# Altium PCB PCB1.PcbDoc (part 1 of 2)
Units mil, origin at the board's own origin, x right, y up, seen from the top; angles counter-clockwise.
Board outline 3500 x 2300 mil, 2 copper layers (Top Layer, Bottom Layer); 42 components, 76 nets, 256 pads, 63 vias.
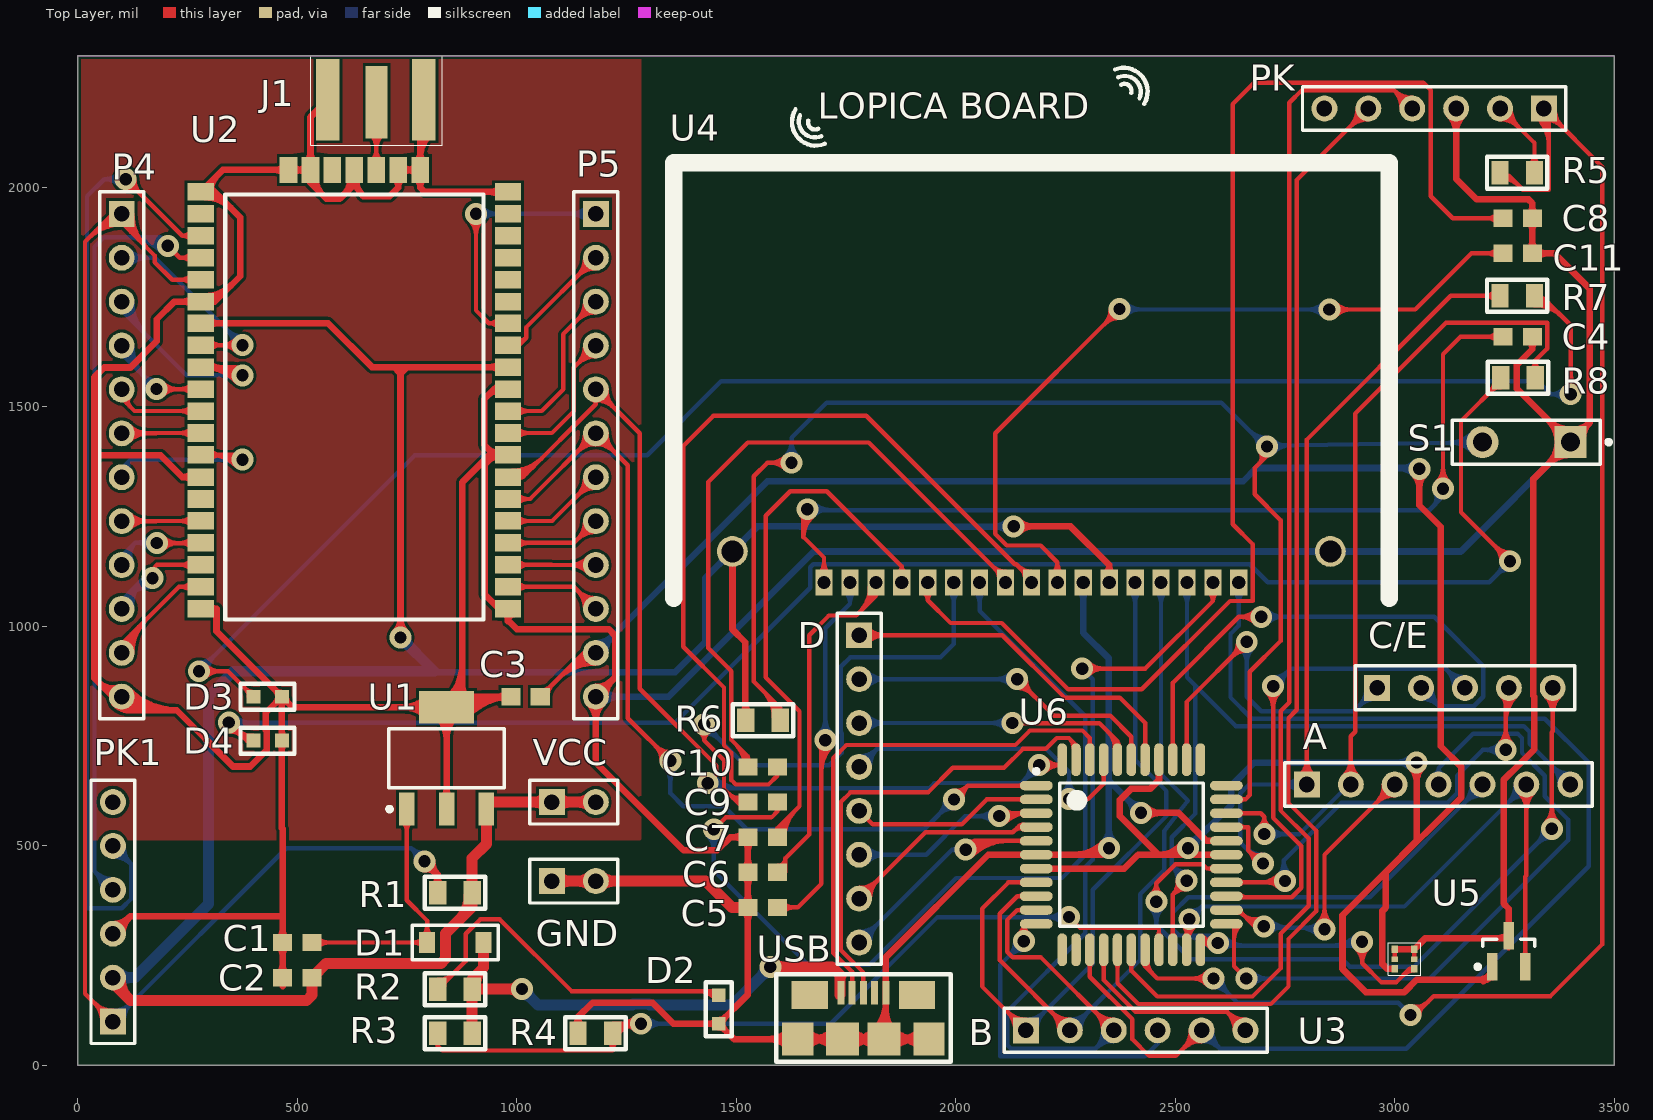
[diagram p0: Top Layer view]
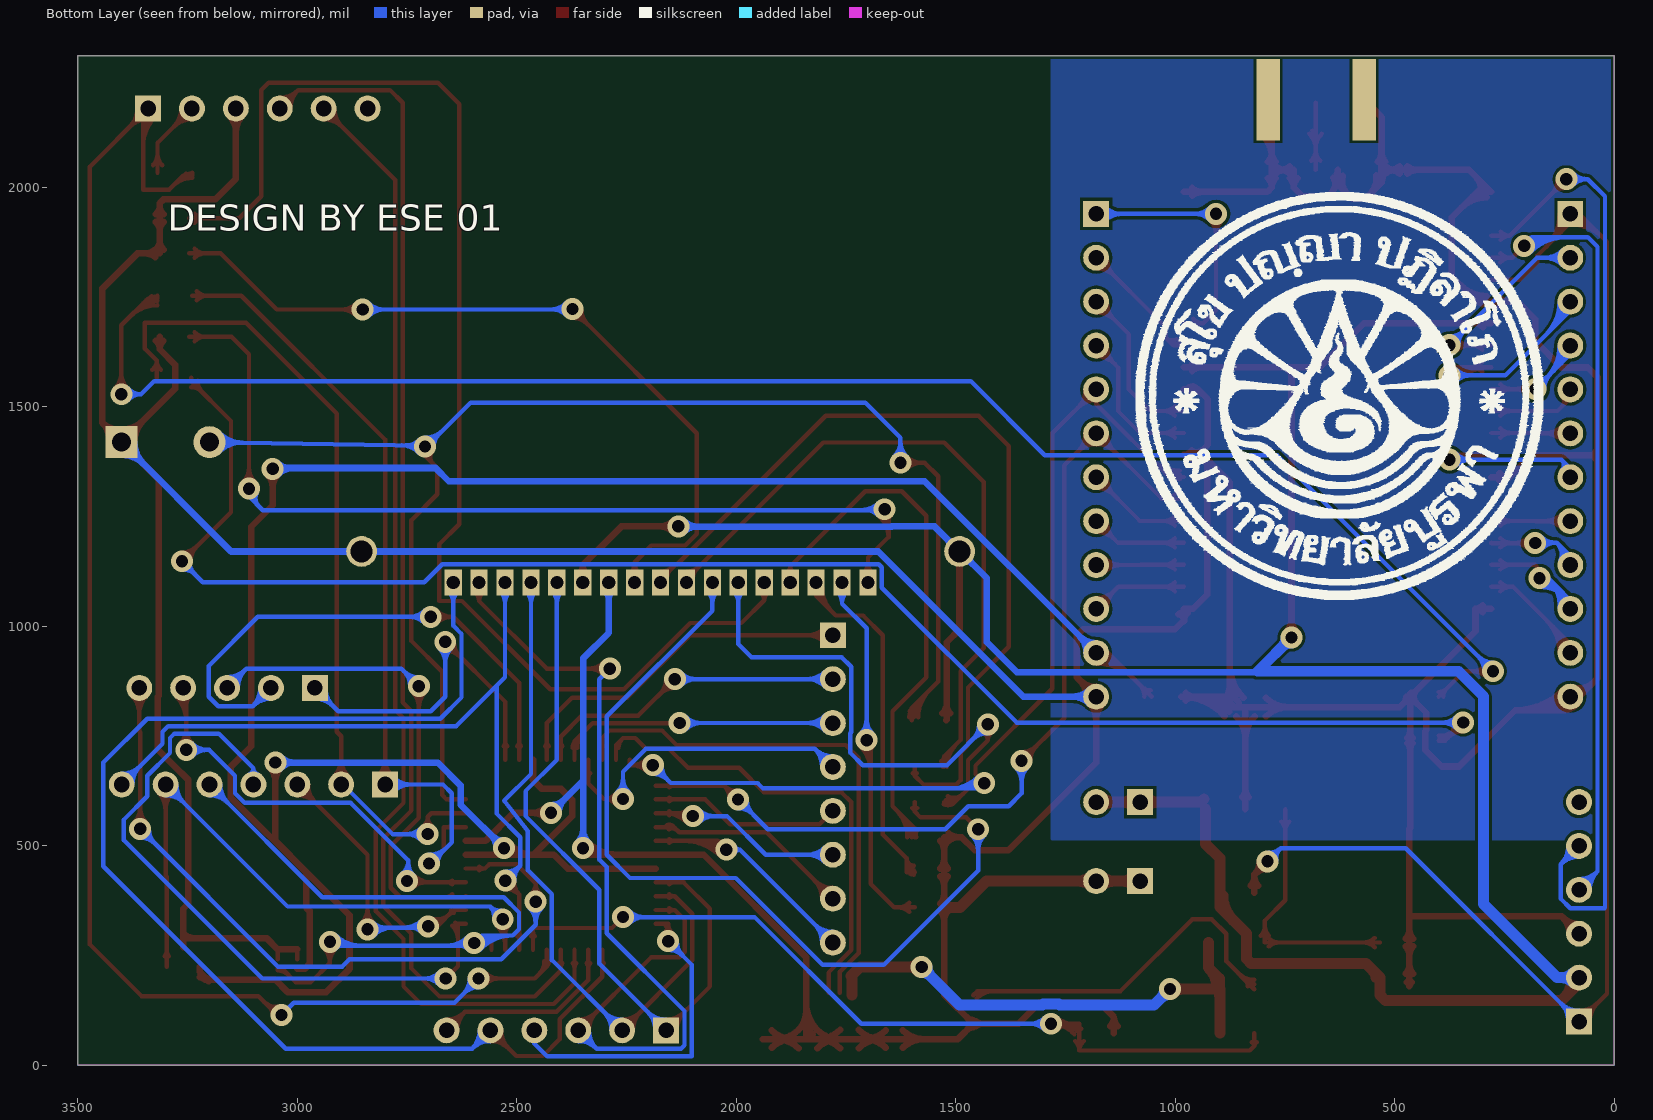
[diagram p1: Bottom Layer view, seen from below]

## Layer stack, top to bottom
Top Layer: signal copper 1.4
Dielectric: dielectric 12.6, FR-4, Dk 4.8
Bottom Layer: signal copper 1.4

## Board outline
0,0 0,2300 3500,2300 3500,0

## Design rules (kind name [scope] priority, off if disabled: settings)
Clearance [All] p1: gap=7
HoleSize [All] p1: absolutevalues=TRUE maxlimit=100 minlimit=0 maxpercent=80.000 minpercent=20.000
HoleToHoleClearance [All] p1: gap=5 allowstackedmicrovias=TRUE
MinimumSolderMaskSliver [All] p1: minsoldermaskwidth=1
PolygonConnect [All] p1: connectstyle=Relief reliefconductorwidth=10 reliefentries=4 polygonreliefangle="90 Angle"
RoutingVias [All] p1: holewidth=28 width=50 viastyle="Through Hole" minholewidth=28 minwidth=50 maxholewidth=28 maxwidth=50
SilkscreenOverComponentPads [All] p1: minsilkscreentomaskgap=1
SolderMaskExpansion [All] p1: expansion=4
TestPointUsage [All] p1: valid=0 allowmultiple=FALSE
Testpoint [All] p1: side=15 testpointundercomponent=TRUE minsize=40 maxsize=100 preferedsize=60 minholesize=0 maxholesize=40 preferedholesize=32 testpointgrid=1 style=1023 order=0-112345678
Width [All] p1: maxlimit=100 minlimit=10 preferedwidth=15
20 further rules are at their usual default settings.

## Components (designator, comment, footprint, x,y, rotation, side; value= is the part's Value field where it differs from the comment)
A "PINA" HDR1X7 2800,640 r0 top (schematic designator P2)
B "PINB" HDR1X6 2160,80 r0 top (schematic designator P3)
C1 "10V" 1608[0603] 500,280 r0 top
C2 "10V" 1608[0603] 500,200 r0 top
C3 "10V" 1608[0603] 1020,840 r0 top
C4 "10V" 1608[0603] 3280,1660 r180 top
C5 "10V" 1608[0603] 1560,360 r0 top
C6 "10V" 1608[0603] 1560,440 r0 top
C7 "10V" 1608[0603] 1560,520 r0 top
C8 "10V" 1608[0603] 3280,1930 r180 top
C9 "10V" 1608[0603] 1560,600 r0 top
C10 "10V" 1608[0603] 1560,680 r180 top
C11 "10V" 1608[0603] 3280,1850 r180 top
C/E "PINC/E" HDR1X5 2960,860 r0 top (schematic designator P7)
D "PIND" HDR1X8 1780,980 r270 top (schematic designator P6)
D1 "MBR0520LT1G" Diode 860,280 r0 top
D2 "RED" LED 1460,160 r270 top
D3 "RED" LED 400,840 r0 top
D4 "Green" LED 400,740 r0 top
GND "GND" HDR1X2 1080,420 r0 top (schematic designator P11)
J1 "Antenna" Antenna 569.5,2200 r0 top
P4 "Header 12" HDR1X12 100,1940 r270 top
P5 "Header 12" HDR1X12 1180,1940 r270 top
PK "DNP pickit" HDR1X6 3340,2180 r180 top (schematic designator P9)
PK1 "DNP Pickit3" HDR1X6 80,100 r90 top (schematic designator P1)
R1 "Res3" Resistor 800,420 r0 top
R2 "Res3" Resistor 800,200 r0 top
R3 "Res3" Resistor 800,100 r0 top
R4 "Res3" Resistor 1120,100 r0 top
R5 "Res3" Resistor 3220,2060 r0 top
R6 "Res3" Resistor 1620,760 r180 top
R7 "Res3" Resistor 3220,1780 r0 top
R8 "Res3" Resistor 3340,1540 r180 top
S1 "SW-PB" SPST-2 3300,1420 r180 top
U1 "MCP1825S-3302E/DB" SOT-223-DB3_L 840,700 r90 top
U2 "RN2903" RN2903 280,2040 r0 top
U3 "PNJ4K01FTR-ND" PNJ4K01FTR-ND 3000,220 r0 top
U4 "OLED" OLED 1700,1100 r0 top
U5 "MCP9700" SOT95P237X10-3N 3260,260 r90 top
U6 "Pic18lf45k50" TQFP80P1200X1200X120-44N 2400,480 r0 top
USB "USB MICRO" "CONN USB MICRO B" 1640,60 r0 top (schematic designator P8)
VCC "VCC" HDR1X2 1080,600 r0 top (schematic designator P10)

## Footprints (in the part's own frame and the unit in brackets; to place one, negate y for a bottom-side part, rotate by r counter-clockwise, add the part's x,y. Pads: shape width x height; smd on the part's side, far side on the other; paste and mask are expansions set on the pad)
1608[0603] [mm] "Chip Capacitor; Body 1.6 x 0.8 mm (LxW typ)"
  rect 1.1x1 smd: 1(-0.85,0) 2(0.85,0)
Antenna [mm] "SMA-J-P-X-ST-EM1"
  rect 1.27x4.2 smd: 1(2.825,-0.15)
  rect 1.35x4.7 smd: 2(0,0) 3(5.56,0)
  rect 1.35x4.7 smd far side: 4(0,0) 5(5.56,0)
  silkscreen extent -1,-2.63 6.63,2.5
"CONN USB MICRO B" [mm] "10118192-0001LF"
  rect 2.1x1.6 smd: 0(0.7,2.55) 0(6.9,2.55)
  round 0.25 on Top Overlay: 0(2.05,3.325)
  rect 0.4x1.35 smd: 1(2.5,2.675) 2(3.15,2.675) 3(3.8,2.675) 4(4.45,2.675) 5(5.1,2.675)
  rect 1.8x1.9 smd: 6(0,0) 9(7.6,0)
  rect 1.9x1.9 smd: 7(2.6,0) 8(5,0)
  silkscreen extent -1.25,-1.3 8.85,3.75
Diode [mm]
  rect 0.91x1.22 smd: 1(-1.635,0) 2(1.635,0)
  silkscreen extent -2.48,-1 2.48,1
HDR1X2 [mm] "Connector; Header; 2 Position"
  rect 1.5x1.5 hole 0.9: 1(0,0)
  round 1.5 hole 0.9: 2(2.54,0)
  silkscreen extent -1.27,-1.27 3.81,1.27
HDR1X5 [mm] "Connector; Header; 5 Position"
  rect 1.5x1.5 hole 0.9: 1(0,0)
  round 1.5 hole 0.9: 2(2.54,0) 3(5.08,0) 4(7.62,0) 5(10.16,0)
  silkscreen extent -1.27,-1.27 11.43,1.27
HDR1X6 [mm] "Connector; Header; 6 Position"
  rect 1.5x1.5 hole 0.9: 1(0,0)
  round 1.5 hole 0.9: 2(2.54,0) 3(5.08,0) 4(7.62,0) 5(10.16,0) 6(12.7,0)
  silkscreen extent -1.27,-1.27 13.97,1.27
HDR1X7 [mm] "Connector; Header; 7 Position"
  rect 1.5x1.5 hole 0.9: 1(0,0)
  round 1.5 hole 0.9: 2(2.54,0) 3(5.08,0) 4(7.62,0) 5(10.16,0) 6(12.7,0) 7(15.24,0)
  silkscreen extent -1.27,-1.27 16.51,1.27
HDR1X8 [mm] "Connector; Header; 8 Position"
  rect 1.5x1.5 hole 0.9: 1(0,0)
  round 1.5 hole 0.9: 2(2.54,0) 3(5.08,0) 4(7.62,0) 5(10.16,0) 6(12.7,0) 7(15.24,0) 8(17.78,0)
  silkscreen extent -1.27,-1.27 19.05,1.27
HDR1X12 [mm] "Connector; Header; 12 Position"
  rect 1.5x1.5 hole 0.9: 1(0,0)
  round 1.5 hole 0.9: 2(2.54,0) 3(5.08,0) 4(7.62,0) 5(10.16,0) 6(12.7,0) 7(15.24,0) 8(17.78,0) 9(20.32,0) 10(22.86,0) 11(25.4,0) 12(27.94,0)
  silkscreen extent -1.27,-1.27 29.21,1.27
LED [mm] "APT1608EC"
  rect 0.8x0.8 smd: 1(0,0) 2(1.65,0)
  silkscreen extent -0.75,-0.75 2.38,0.75
OLED [mil] "NHD-C12832A1Z-FSW-FBW-3V3"
  rect 39.37x60 hole 30: 1(0,0) 2(59.06,0) 3(118.11,0) 4(177.17,0) 5(236.22,0) 6(295.28,0) 7(354.33,0) 8(413.39,0) 9(472.44,0) 10(531.5,0) 11(590.55,0) 12(649.61,0) 13(708.66,0) 14(767.72,0) 15(826.77,0) 16(885.83,0) 17(944.88,0)
  round 70 hole 50: 18(-208.66,70.87) 19(1153.54,70.87)
  silkscreen extent -343,-35 1287,957, body extent -345,-47 1294,960, height 161
PNJ4K01FTR-ND [mm] "PNJ4K01F"
  rect 0.37x0.43 smd: 1(0,0) 3(0,1.125) 4(1.13,1.125) 6(1.13,0)
  rect 0.37x0.3 smd: 2(0,0.56) 5(1.13,0.56)
  rect 0.1x0.1 on Top Overlay: 2(0.425,0.825) 2(0.7,0.825)
  silkscreen extent -0.38,-0.38 1.5,1.5, body extent -0.08,-0.23 1.2,1.35, height 0.53
Resistor [mm] "RNCF0805DTE10K0"
  rect 1x1.35 smd: 1(0.5,-0.675) 2(2.5,-0.675)
  silkscreen extent -0.25,-1.6 3.25,0.25
RN2903 [mil]
  rect 60x40 smd mask+3.94: 1(700,-999.61) 2(700,-949.61) 3(700,-899.61) 4(700,-849.61) 5(700,-799.61) 6(700,-749.61) 7(700,-699.61) 8(700,-649.21) 9(700,-599.21) 10(700,-549.21) 11(700,-499.21) 12(700,-449.21) 13(700,-399.21) 14(700,-349.21) 15(700,-300) 16(700,-250) 17(700,-200) 18(700,-150) 19(700,-100) 20(700,-50) 28(0,-50) 29(0,-100) 30(0,-150) 31(0,-200) 32(0,-250) 33(0,-300) 34(0,-349.21) 35(0,-399.21) 36(0,-449.21) 37(0,-499.21) 38(0,-549.21) 39(0,-599.21) 40(0,-649.21) 41(0,-699.61) 42(0,-749.61) 43(0,-799.61) 44(0,-849.61) 45(0,-899.61) 46(0,-949.61) 47(0,-999.61)
  rect 40x60 smd mask+3.94: 21(500,0) 22(450,0) 23(400,0) 24(350,0) 25(300,0) 26(250,0) 27(200,0)
  silkscreen extent 56,-1024 644,-56, body extent 0,-1050 700,0, height 131
SOT95P237X10-3N [mm] "SOT23, 3-Leads, Body 3.0x2.6mm (max), Pitch 0.95mm, IPC Medium Density"
  rect 1.6x0.6 smd: 1(-0.9,0.95) 2(-0.9,-0.95) 3(0.9,0)
  silkscreen extent -1.02,-1.5 0.7,1.92, body extent -0.7,-1.52 0.7,1.53, height 1.12
SOT-223-DB3_L [mm] "SOT223, 4-Leads, Body 6.5x3.5mm, Pitch 2.3mm, Lead Span 7mm, IPC High Density"
  rect 1.9x0.9 smd: 1(-2.95,2.3) 2(-2.95,0) 3(-2.95,-2.3)
  rect 1.9x3.2 smd: 4(2.95,0)
  silkscreen extent -3.07,-3.35 1.7,3.42, body extent -1.85,-3.35 1.85,3.35, height 1.8
SPST-2 [mm] "Circuit Breaker; 2 Leads"
  rect 1.85x1.85 hole 1.1: 1(-2.54,0)
  round 1.85 hole 1.1: 2(2.54,0)
  silkscreen extent -4.89,-1.27 4.28,1.27
TQFP80P1200X1200X120-44N [mm] "TQFP, 44-Leads, Body 12.0x12.0mm (max), Pitch 0.80mm, IPC Medium Density"
  oval 1.9x0.55 smd: 1(-5.5,4) 2(-5.5,3.2) 3(-5.5,2.4) 4(-5.5,1.6) 5(-5.5,0.8) 6(-5.5,0) 7(-5.5,-0.8) 8(-5.5,-1.6) 9(-5.5,-2.4) 10(-5.5,-3.2) 11(-5.5,-4) 23(5.5,-4) 24(5.5,-3.2) 25(5.5,-2.4) 26(5.5,-1.6) 27(5.5,-0.8) 28(5.5,0) 29(5.5,0.8) 30(5.5,1.6) 31(5.5,2.4) 32(5.5,3.2) 33(5.5,4)
  oval 0.55x1.9 smd: 12(-4,-5.5) 13(-3.2,-5.5) 14(-2.4,-5.5) 15(-1.6,-5.5) 16(-0.8,-5.5) 17(0,-5.5) 18(0.8,-5.5) 19(1.6,-5.5) 20(2.4,-5.5) 21(3.2,-5.5) 22(4,-5.5) 34(4,5.5) 35(3.2,5.5) 36(2.4,5.5) 37(1.6,5.5) 38(0.8,5.5) 39(0,5.5) 40(-0.8,5.5) 41(-1.6,5.5) 42(-2.4,5.5) 43(-3.2,5.5) 44(-4,5.5)
  silkscreen extent -5.62,-4.15 4.15,4.95, body extent -5,-5 5,5, height 1.2

## Part data
A: library part "Header 7", "Header, 7-Pin"
B PK PK1: library part "Header 6", "Header, 6-Pin"
C1 C2 C3 C4 C5 C6 C7 C8 C9 C10 C11: library part "Cap Semi", "Capacitor (Semiconductor SIM Model)"
C/E: library part "Header 5", "Header, 5-Pin"
D: library part "Header 8", "Header, 8-Pin"
D1: library part MBR0520LT1GOSTR-ND
D2 D3 D4: library part LED2, "Typical RED, GREEN, YELLOW, AMBER GaAs LED"
GND VCC: library part "Header 2", "Header, 2-Pin"
P4 P5: "Header, 12-Pin"
R1 R2 R3 R4 R5 R6 R7 R8: "Resistor"
S1: "Switch"
U1: "500 mA, Low Voltage, Low Quiescent Current LDO Regulator, 3-Pin SOT-223, Extended Temperature"
USB: library part "CONN USB MICRO B"

## Via types
v1: diameter 50, hole 28, Top Layer to Bottom Layer, 63 vias

## Nets (pads, with @x,y where several pads share a name; then routed paths per layer and width w, separated by ;. In a path a pad name is that pad's centre, name@x,y a point inside that pad or via, vN(x,y) a via of type N, cw(c..) or ccw(c..) an arc to the next point about the centre after c; other vN are vias at no path point)
3.3V: PK.2 R5.2 | length 382.9
  Top Layer w10: PK.2@3240,2155.47 cw(c3240,2096.26) 3281.87,2138.13 cw(c3323.74,2180) PK.2@3264.53,2180 ; PK.2@3240,2165.47 cw(c3240,2130.4) 3264.8,2155.2 cw(c3289.6,2180) PK.2@3254.53,2180 ; PK.2@3240,2180 3318.43,2101.57 R5.2@3318.43,2033.43 ; R5.2@3308.04,2050.7 ccw(c3282.97,2075.77) 3318.43,2075.77 ccw(c3353.88,2075.77) R5.2@3328.81,2050.7
+3.3V: C3.2 P5.11 U3.1 U5.1 U6.7 U6.28 U6.37 | length 6756
  Top Layer w10: C3.2@1053.46,840 1153.46,940 P5.11@1180,940 ; C3.2@1055.43,854.68 ccw(c1055.43,885.39) 1077.14,863.68 ; C3.2@1070.12,840 cw(c1110.32,840) 1081.89,868.43 ; 1092.83,879.37 cw(c1180,792.19) P5.11@1180,915.47 ; 1109.9,896.44 cw(c1180,826.34) P5.11@1180,925.47 ; 1126.97,913.51 cw(c1180,860.48) P5.11@1180,935.47 ; 1144.04,930.58 cw(c1180,894.62) P5.11@1180,945.47
  Top Layer w15: U6.7@2183.46,448.5 2384,448.5 2415.5,480 2465,480 ; U6.37@2462.99,696.54 2462.99,650.49 2442.5,630 2399,630 2374,605 2374,567.63 2461.63,480 2465,480 ; 2494.54,480 ccw(c2494.54,520.18) v1@2526.98,496.47 ; v1@2514.87,505.32 cw(c2465,541.76) 2465,480 ; v1(2529,495) v1@2544,480 ; U6.28@2616.54,480 v1@2544,480 ; 2881,339.57 2881,220 2934,167 3022,167 3050,195 3204.6,195 ; 2881,342 2980,441 ; 2980,439 2980,360 2972,352 2972,231 2983,220 U3.1@3000,220 ; v1@3037.63,677.63 cw(c3007.75,647.75) 3050,647.75 cw(c3092.25,647.75) v1@3062.37,677.63 ; v1@3043.63,1346.63 cw(c3013.75,1316.75) 3056,1316.75 cw(c3098.25,1316.75) v1@3068.37,1346.63 ; v1(3050,690) 3050,511 2980,441 ; v1(3056,1359) 3056,1276 3105,1227 3105,727 3152,680 3152,611 2982,441 2980,441 ; 3188.34,195 ccw(c3188.34,239.14) U5.1@3219.55,207.93 ; 3201.38,191.78 cw(c3222.6,170.56) U5.1@3222.6,200.57 ; U5.1@3218.41,205.89 cw(c3204.6,209.2) 3204.6,195 ; U5.1@3222.6,224.57 3222.6,213 3204.6,195 ; 2465,480 2529,480 v1@2544,480
  Bottom Layer w15: P5.11@1180,940 1571,1331 2655.14,1331 2685.14,1361 3054,1361 v1(3056,1359) ; P5.11@1180,962.03 ccw(c1180,1015.21) 1217.6,977.6 ccw(c1255.21,940) P5.11@1202.03,940 ; v1(2529,495) 2628,594 2628,638 2680,690 v1(3050,690) ; v1@2529,512.5 ccw(c2529,554.75) 2558.87,524.87 ccw(c2588.75,495) v1@2546.5,495 ; 3008.92,1361 cw(c3008.92,1311.92) v1@3043.63,1346.63 ; 3018.58,1361 ccw(c3018.58,1396.42) v1@3043.63,1371.37 ; v1@3037.63,677.63 ccw(c3007.75,647.75) 3007.75,690 ccw(c3007.75,732.25) v1@3037.63,702.37
+VUSB: D1.2 R2.2 R3.2 USB.1 | length 1418.4
  Top Layer w10: R2.2@898.43,173.43 898.43,174 R2.2@898.43,173.43
  Top Layer w25: R3.2@898.43,73.43 R2.2@898.43,173.43 ; R2.2@898.43,174 v1(1012,174) ; R2.2@898.62,158.83 R2.2@898.62,197.83 ; R2.2@904.45,184.24 cw(c918.22,193.2) 906.6,204.83 924.37,222.6 D1.2@924.37,280 ; R2.2@905.61,180.32 cw(c962.4,180.32) 922.24,220.47 ; v1@1003.16,165.16 ccw(c981.82,143.82) 981.82,174 ccw(c981.82,204.18) v1@1003.16,182.84 ; v1(1577.76,224.41) 1718.02,224.41 1738.43,204 ; v1@1586.59,215.57 cw(c1607.93,194.23) 1607.93,224.41 cw(c1607.93,254.59) v1@1586.59,233.25 ; USB.1@1736.22,160.13 1736.22,198.82
  Bottom Layer w25: v1@1012,161.5 cw(c1012,131.32) 1033.34,152.66 cw(c1054.68,174) v1@1024.5,174 ; v1(1012,174) 1048,138 1263.07,138 1264.57,139.5 1301.43,139.5 1302.93,138 1491.35,138 v1(1577.76,224.41) ; v1@1565.26,224.41 cw(c1535.08,224.41) 1556.42,203.07 cw(c1577.76,181.73) v1@1577.76,211.91
GND: C1.1 C2.1 C3.1 C4.1 C5.1 C6.1 C7.1 C8.1 C11.1 D2.2 D3.2 D4.2 GND.1 GND.2 J1.2 J1.3 P4.12 P5.12 PK1.3 PK.3 R4.1 S1.1 U1.2 U1.4 U2.1 U2.8 U2.11 U2.20 U2.21 U2.22 U2.24 U2.26 U2.27 U2.28 U2.33 U2.41 U2.47 U3.2@3000,242.05 U3.3 U3.4 U3.5 U4.11 U4.19 U5.3 U6.6 U6.29 USB.5 USB.6 USB.7 USB.8 USB.9 | length 23438.6
  Top Layer w10: U3.2@3000,242.05 U3.3@3000,264.29 ; U3.5@3044.49,242.05 U3.4@3044.49,264.29
  Top Layer w15: 38,1390 188.39,1390 238,1340.39 ; 39,1379 50,1390 39,1401 ; 48,872 ccw(c79.7,903.69) P4.12@93.31,860.99 ; 65.42,854.58 ccw(c88.12,877.28) P4.12@97.87,846.7 ; PK1.3@80,300 120,340 466.54,340 ; PK1.3@80,322.03 ccw(c80,375.21) 117.6,337.6 ccw(c155.21,300) PK1.3@102.03,300 ; P4.12@83.53,823.99 ccw(c119,858.47) 119,809 ; P4.12@94.28,834.44 ccw(c154.5,892.97) 154.5,809 ; P4.12@105.04,844.9 ccw(c190,927.48) 190,809 ; P4.12@115.8,855.35 ccw(c225.49,961.98) 225.49,809 ; U2.33@261.16,1731.16 ccw(c239.82,1709.82) 239.82,1740 ccw(c239.82,1770.18) U2.33@261.16,1748.84 ; U2.47@280,1040.39 316,1040.39 ; U2.28@288.42,1991.94 cw(c299.18,1978.7) 311.24,1990.76 ; U2.33@290,1737.5 ccw(c290,1784.58) 323.29,1751.29 ; U2.33@290,1752.5 ccw(c290,1835.79) 348.9,1776.9 ; U2.28@290,1977.5 cw(c290,1894.21) 348.9,1953.1 ; U2.28@290,1992.5 cw(c290,1945.42) 323.29,1978.71 ; U2.28@297.88,1980.3 cw(c309.72,1965.72) 323,1979 ; U2.47@299.76,1032.59 cw(c316,1019.61) 316,1040.39 ; U2.47@299.76,1048.2 ccw(c316,1061.18) 316,1040.39 ; U2.33@300.74,1733.6 cw(c312,1726.89) 312,1740 ; U2.33@300.74,1746.4 ccw(c312,1753.11) 312,1740 ; U2.28@300.74,1983.6 cw(c312,1976.89) 312,1990 ; U2.28@300.74,1996.4 ccw(c312,2003.11) 312,1990 ; U2.28@302.5,1990 cw(c356.82,1990) 318.41,2028.41 ; C2.1@457.92,208.62 ccw(c437.12,229.42) 466.54,229.42 ccw(c495.95,229.42) C2.1@475.15,208.62 ; C1.1@457.92,271.38 cw(c437.12,250.58) 466.54,250.58 cw(c495.95,250.58) C1.1@475.15,271.38 ; C1.1@457.92,288.62 ccw(c437.12,309.42) 466.54,309.42 ccw(c495.95,309.42) C1.1@475.15,288.62 ; D4.2@459.13,734.17 cw(c445.05,720.09) 464.96,720.09 cw(c484.87,720.09) D4.2@470.79,734.17 ; D4.2@459.13,745.83 ccw(c445.05,759.91) 464.96,759.91 ccw(c484.87,759.91) D4.2@470.79,745.83 ; D3.2@459.13,834.17 cw(c445.05,820.09) 464.96,820.09 cw(c484.87,820.09) D3.2@470.79,834.17 ; C2.1@460.95,189.17 cw(c456.22,180) 466.54,180 ; D3.2@464.96,848.25 cw(c464.96,868.16) 450.88,854.08 cw(c436.8,840) 456.71,840 cw(c436.8,840) 450.88,825.92 cw(c464.96,811.84) 464.96,831.75 cw(c464.96,811.84) 479.04,825.92 cw(c493.12,840) D3.2@473.21,840 ; U2.27@471.16,2031.16 ccw(c449.82,2009.82) 449.82,2040 ccw(c449.82,2070.18) U2.27@471.16,2048.84 ; C2.1@472.12,189.17 ccw(c476.86,180) 466.54,180 ; U2.27@488.84,2031.16 cw(c510.18,2009.82) 510.18,2040 cw(c510.18,2070.18) U2.27@488.84,2048.84 ; U2.26@521.16,2031.16 ccw(c499.82,2009.82) 499.82,2040 ccw(c499.82,2070.18) U2.26@521.16,2048.84 ; U2.26@521.16,2058.84 ccw(c499.82,2080.18) 530,2080.18 ccw(c560.18,2080.18) U2.26@538.84,2058.84 ; U2.26@527.53,2030.39 ccw(c556.21,2025.85) 535.68,2005.32 ; U2.26@542.35,2028.05 ccw(c592.16,2020.16) 556.5,1984.5 ; J1.2@569.5,2200 530,2160.5 U2.26@530,2040 ; 608,1986 ccw(c579.48,2014.53) U2.24@618.05,2026.34 ; 625.64,2003.64 ccw(c606.49,2022.8) U2.24@632.39,2030.73 ; U2.24@630,2040 630,2008 ; 639.59,1994.57 cw(c658.76,2008.26) U2.24@639.97,2022.46 ; U2.22@721.2,2021.12 cw(c700.25,2000) 730,2000 ; U2.22@738.8,2021.12 ccw(c759.75,2000) 730,2000 ; U2.22@738.84,2031.16 cw(c760.18,2009.82) 760.18,2040 cw(c760.18,2070.18) U2.22@738.84,2048.84 ; U2.21@771.16,2031.16 ccw(c749.82,2009.82) 749.82,2040 ccw(c749.82,2070.18) U2.21@771.16,2048.84 ; U2.21@771.16,2058.84 ccw(c749.82,2080.18) 780,2080.18 ccw(c810.18,2080.18) U2.21@788.84,2058.84 ; U2.21@771.2,2021.12 cw(c750.25,2000) 780,2000 ; J1.3@774.91,2120.57 cw(c762.62,2108.28) J1.3@780,2108.28 ; U2.21@780,2067.73 cw(c854.72,2067.73) J1.3@801.89,2120.57 ; 780,2103.94 cw(c818.51,2103.94) J1.3@791.28,2131.17 ; J1.3@780,2191.6 U2.21@780,2040 ; U2.21@788.8,2021.12 ccw(c809.75,2000) 780,2000 ; U1.4@793.27,795 ccw(c742.22,743.95) 742.22,816.14 ccw(c742.22,888.33) U1.4@793.27,837.29 ; U1.4@818.86,795 cw(c767.81,743.95) 840,743.95 cw(c912.19,743.95) U1.4@861.14,795 ; U1.2@832.78,610.77 ccw(c815.34,628.21) 840,628.21 ccw(c864.66,628.21) U1.2@847.22,610.77 ; U1.2@840,583.86 U1.4@840,816.14 ; U1.4@844.45,837.29 ccw(c768.27,913.46) 876,913.46 ; U1.4@855.05,826.68 ccw(c804.48,877.25) 876,877.25 ; U1.4@863.86,840 C3.1@986.54,840 ccw(c986.53,706.99) U1.4@887.79,796.11 ; U1.4@865.52,816.21 cw(c919.04,767.9) 919.04,840 ; 876,863.2 ccw(c912.65,863.2) U1.4@886.73,837.29 ; U1.4@876.65,806.16 cw(c952.78,737.44) 952.78,840 ; 936.61,1402.97 ccw(c950.84,1417.21) U2.8@962.66,1400.91 ; 938,1390.79 876,1328.79 876,816.14 U1.4@840,816.14 ; 938.18,1380.18 cw(c950.64,1367.73) U2.8@961.96,1381.22 ; 938.18,1530.18 cw(c950.64,1517.73) U2.11@961.96,1531.22 ; 939.4,1531.4 cw(c968.21,1502.58) U2.11@970.12,1543.29 ; 939.85,1381.85 cw(c967.65,1354.06) U2.8@970.16,1393.28 ; 949.04,1390.54 ccw(c961.29,1402.8) U2.8@971.47,1388.76 ; 949.75,1391.75 cw(c961.2,1380.31) U2.8@971.61,1392.7 ; 949.75,1541.75 cw(c961.2,1530.31) U2.11@971.61,1542.7 ; U2.11@959.06,1534.73 ccw(c948.79,1529.04) 948.79,1540.79 ; U2.11@959.06,1546.84 cw(c948.79,1552.53) 948.79,1540.79 ; U2.20@961.16,1981.16 ccw(c939.82,1959.82) 939.82,1990 ccw(c939.82,2020.18) U2.20@961.16,1998.84 ; U2.1@972.08,1030.72 cw(c958.39,1014) 980,1014 ; C3.1@975.95,831.38 ccw(c955.15,810.58) 955.15,840 ccw(c955.15,869.42) C3.1@975.95,848.62 ; 980,1012.17 cw(c996.45,1012.17) U2.1@992.79,1028.21 ; U2.11@980,1540.79 948.79,1540.79 ; U2.20@980,1990 790,1990 780,2000 ; U2.1@987.92,1030.72 ccw(c1001.61,1014) 980,1014 ; R4.1@1131.07,88.93 ccw(c1110.27,109.73) 1139.69,109.73 ccw(c1169.1,109.73) R4.1@1148.3,88.93 ; R4.1@1139.69,73.43 1139.69,110 1172.69,143 1309.11,143 1357.07,95.04 D2.2@1460,95.04 ; P5.12@1164.42,824.42 cw(c1126.82,786.82) 1180,786.82 cw(c1233.18,786.82) P5.12@1195.58,824.42 ; P5.12@1180,862.03 ccw(c1180,915.21) 1217.6,877.6 ccw(c1255.21,840) P5.12@1202.03,840 ; D2.2@1454.17,89.21 ccw(c1440.09,75.13) 1440.09,95.04 ccw(c1440.09,114.95) D2.2@1454.17,100.87 ; D2.2@1460,86.79 cw(c1460,66.88) 1474.08,80.96 cw(c1488.16,95.04) 1468.25,95.04 cw(c1488.16,95.04) 1474.08,109.12 cw(c1460,123.2) D2.2@1460,103.29 ; C7.1@1515.95,511.38 ccw(c1495.15,490.58) 1495.15,520 ccw(c1495.15,549.42) C7.1@1515.95,528.62 ; C5.1@1517.92,351.38 cw(c1497.12,330.58) 1526.54,330.58 cw(c1555.95,330.58) C5.1@1535.15,351.38 ; C5.1@1517.92,368.62 ccw(c1497.12,389.42) 1526.54,389.42 ccw(c1555.95,389.42) C5.1@1535.15,368.62 ; C6.1@1517.92,431.38 cw(c1497.12,410.58) 1526.54,410.58 cw(c1555.95,410.58) C6.1@1535.15,431.38 ; C6.1@1517.92,448.62 ccw(c1497.12,469.42) 1526.54,469.42 ccw(c1555.95,469.42) C6.1@1535.15,448.62 ; C7.1@1517.92,511.38 cw(c1497.12,490.58) 1526.54,490.58 cw(c1555.95,490.58) C7.1@1535.15,511.38 ; USB.6@1620.25,40.25 ccw(c1572.56,-7.44) 1572.56,60 ccw(c1572.56,127.44) USB.6@1620.25,79.75 ; USB.6@1659.75,40.25 cw(c1707.44,-7.44) 1707.44,60 cw(c1707.44,127.44) USB.6@1659.75,79.75 ; USB.7@1721.22,38.86 ccw(c1670.17,-12.19) 1670.17,60 ccw(c1670.17,132.19) USB.7@1721.22,81.14 ; USB.7@1763.51,38.86 cw(c1814.55,-12.19) 1814.55,60 cw(c1814.55,132.19) USB.7@1763.51,81.14 ; USB.8@1815.71,38.86 ccw(c1764.66,-12.19) 1764.66,60 ccw(c1764.66,132.19) 1815.71,81.14 ccw(c1755.15,141.7) USB.5@1840.79,141.7 ; USB.8@1826.31,70.54 ccw(c1791.37,105.48) 1840.79,105.48 ; USB.8@1840.79,60 USB.5@1840.79,165.32 1840.79,246.79 2074,480 U6.6@2183.46,480 2334,480 v1(2349,495) ; 1840.79,122.68 ccw(c1899.53,122.68) 1857.99,81.14 ccw(c1909.04,132.19) 1909.04,60 ccw(c1909.04,-12.19) USB.8@1857.99,38.86 ; USB.9@1919.46,40.25 ccw(c1871.78,-7.44) 1871.78,60 ccw(c1871.78,127.44) USB.9@1919.46,79.75 ; USB.9@1939.21,60 USB.8@1836.85,60 USB.7@1742.36,60 USB.6@1640,60 1495.04,60 D2.2@1460,95.04 ; 2270.54,480 ccw(c2270.54,573.46) v1@2336.63,507.37 ; 2306.75,480 ccw(c2306.75,537.25) v1@2347.23,496.77 ; v1(2422,575.5) 2507.5,575.5 2571.5,511.5 U6.29@2616.54,511.5 ; v1@2434.37,563.12 cw(c2464.25,533.25) 2464.25,575.5 cw(c2464.25,617.74) v1@2434.37,587.87 ; U3.3@3000,264.29 U3.4@3044.49,264.29 3070.2,290 U5.3@3254.57,290 ; PK.3@3124.42,2164.42 cw(c3086.82,2126.82) 3140,2126.82 cw(c3193.18,2126.82) PK.3@3155.58,2164.42 ; PK.3@3140,2180 3140,2020 3187,1973 3305,1973 3313.46,1964.54 C8.1@3313.46,1930 C11.1@3313.46,1850 3364,1850 3444,1770 3444,1464 ; 3236.47,290 ccw(c3236.47,318.96) U5.3@3256.95,298.48 ; U5.3@3260,269 U5.3@3260,295.43 3260,357 3248,369 3248,650.26 3281.76,684.03 3282.03,684.03 3318,720 3318,839.74 3315.97,841.76 3315.97,1335.97 S1.1@3400,1420 ; C11.1@3304.85,1858.62 ccw(c3284.05,1879.42) 3313.46,1879.42 ccw(c3342.88,1879.42) C11.1@3322.08,1858.62 ; C8.1@3304.85,1921.38 cw(c3284.05,1900.58) 3313.46,1900.58 cw(c3342.88,1900.58) C8.1@3322.08,1921.38 ; C8.1@3304.85,1938.62 ccw(c3284.05,1959.42) 3313.46,1959.42 ccw(c3342.88,1959.42) C8.1@3322.08,1938.62 ; C4.1@3305.04,1651.2 cw(c3286.15,1631.47) 3313.46,1631.47 ; C4.1@3313.46,1660 3313.46,1631.46 ; C4.1@3321.89,1651.2 ccw(c3340.78,1631.47) 3313.46,1631.47 ; C11.1@3324.05,1841.38 cw(c3344.85,1820.58) 3344.85,1850 cw(c3344.85,1879.42) C11.1@3324.05,1858.62 ; S1.1@3400,1391.08 ccw(c3400,1321.27) 3350.64,1370.64 ccw(c3301.27,1420) 3371.08,1420 ccw(c3301.27,1420) 3350.64,1469.36 ccw(c3400,1518.73) S1.1@3400,1448.92 ; S1.1@3402.45,1448.81 ccw(c3406.89,1501.11) 3444,1464 ; S1.1@3428.81,1422.45 cw(c3481.11,1426.89) 3444,1464 ; 225.5,809 353.5,681 393,681 430.25,718.25 430.25,761.75 428.25,763.75 428.25,803.29 D3.2@464.96,840 ; 225.5,809 111,809 80,840 38,882 38,1360 38,1568 60,1590 120,1590 180,1650 180,1700 220,1740 U2.33@280,1740 312,1740 ; 238,1340.39 U2.41@280,1340.39 238,1340.39 ; 239.82,1340.39 cw(c239.82,1310.22) 261.16,1331.56 ccw(c239.82,1310.22) 239.82,1340.39 ; 239.82,1340.39 ccw(c239.82,1370.57) 261.16,1349.23 cw(c239.82,1370.57) 239.82,1340.39 ; 312,1740 370,1798 370,1932 312,1990 ; 312,1990 U2.28@280,1990 330,2040 U2.27@480,2040 U2.26@530,2040 ; 316,1040.39 316,988.96 D3.2@464.96,840 ; D3.2@464.96,840 D4.2@464.96,740 464.96,540.58 466.54,539 466.54,340 ; D3.2@464.96,840 488.82,816.14 U1.4@840,816.14 ; 466.54,180 466.54,260 ; 466.54,260 cw(c476.86,260) 472.12,269.17 ccw(c476.86,260) 466.54,260 ; 466.54,260 ccw(c456.22,260) 460.95,269.17 cw(c456.22,260) 466.54,260 ; 466.54,260 466.54,340 ; U2.26@530,2040 530,2011 566,1975 597,1975 630,2008 ; 630,2008 cw(c643.11,2008) 636.4,2019.26 ccw(c643.11,2008) 630,2008 ; 630,2008 ccw(c616.89,2008) 623.6,2019.26 cw(c616.89,2008) 630,2008 ; 630,2008 650,1980 710,1980 730,2000 ; 730,2000 U2.22@730,2040 U2.21@780,2040 ; 780,2000 U2.21@780,2040 ; 948.79,1390.79 cw(c948.79,1379.04) 959.06,1384.73 ccw(c948.79,1379.04) 948.79,1390.79 ; 948.79,1390.79 ccw(c948.79,1402.53) 959.06,1396.84 cw(c948.79,1402.53) 948.79,1390.79 ; 948.79,1390.79 926,1413.58 926,1518 948.79,1540.79 ; 948.79,1390.79 927,1369 927,1072.89 959.49,1040.39 U2.1@980,1040.39 980,1014 ; 948.79,1390.79 U2.8@980,1390.79 948.79,1390.79 ; 980,1014 1000,994 1209.53,994 1224.03,979.5 1224.03,884.03 P5.12@1180,840 1180,690 1380,490 1456.86,490 1486.86,520 C7.1@1526.54,520 C6.1@1526.54,440 C5.1@1526.54,360 1526.54,161.58 D2.2@1460,95.04 ; 3313.46,1631.46 3278,1596 3278,1542 S1.1@3400,1420 ; S1.1@3400,1420 3444,1464
  Top Layer w25: GND.1@1080,420 1128,420 GND.2@1180,420 1430,420 1490,360 C5.1@1526.54,360 ; GND.1@1092.04,407.96 cw(c1121.11,378.89) 1121.11,420 cw(c1121.11,461.11) GND.1@1092.04,432.04 ; GND.2@1167.96,407.96 ccw(c1138.89,378.89) 1138.89,420 ccw(c1138.89,461.11) GND.2@1167.96,432.04 ; GND.2@1192.04,407.96 cw(c1221.11,378.89) 1221.11,420 cw(c1221.11,461.11) GND.2@1192.04,432.04
  Bottom Layer w15: P5.12@1180,840 1345.96,840 1648.81,1142.86 1648.81,1143.05 1676.63,1170.87 U4.19@2853.54,1170.87 3150.87,1170.87 S1.1@3400,1420 ; P5.12@1195.58,824.42 cw(c1233.18,786.82) 1233.18,840 cw(c1233.18,893.18) P5.12@1195.58,855.58 ; U4.11@2281.94,1081.07 cw(c2261.13,1060.27) 2290.55,1060.27 cw(c2319.97,1060.27) U4.11@2299.17,1081.07 ; U4.11@2290.55,1100 2290.55,985.45 2349,927 ; v1@2336.63,507.37 ccw(c2306.75,537.25) 2349,537.25 ccw(c2391.25,537.25) v1@2361.37,507.37 ; v1(2349,495) 2349,648.5 ; v1@2404.5,575.5 ccw(c2362.25,575.5) 2392.13,605.37 ccw(c2422,635.24) v1@2422,593 ; v1(2422,575.5) 2349,648.5 ; U4.19@2837.29,1166.43 ccw(c2826.57,1155.71) 2826.57,1170.87 ccw(c2826.57,1186.03) U4.19@2837.29,1175.31 ; U4.19@2869.8,1166.43 cw(c2880.52,1155.71) 2880.52,1170.87 cw(c2880.52,1186.03) U4.19@2869.8,1175.31 ; S1.1@3371.08,1420 cw(c3301.27,1420) 3350.64,1370.64 cw(c3400,1321.27) S1.1@3400,1391.08 ; 2349,648.5 2349,927 ; 2349,648.5 2349,927
NetA_1: A.1 R7.1 U6.30 | length 2392
  Top Layer w10: U6.30@2616.54,542.99 2666,542.99 2666,490 2696.23,459.77 2699.88,459.77 2700,459.89 v1(2700,460) ; U6.30@2647.23,538.87 cw(c2657.18,528.93) 2657.18,542.99 cw(c2657.18,557.06) U6.30@2647.23,547.11 ; 2668,488 ccw(c2689.81,509.8) v1@2695.99,479.59 ; 2668.69,487.31 cw(c2641.37,460) v1@2680,460 ; A.1@2782.66,657.34 ccw(c2740.79,699.21) 2800,699.21 ccw(c2859.21,699.21) A.1@2817.34,657.34 ; A.1@2789.73,650.27 ccw(c2764.93,675.07) 2800,675.07 ccw(c2835.07,675.07) A.1@2810.27,650.27 ; A.1@2800,640 2800,1426 3127.43,1753.43 R7.1@3239.69,1753.43 ; R7.1@3229.3,1743.04 ccw(c3204.23,1717.97) 3204.23,1753.43 ccw(c3204.23,1788.88) R7.1@3229.3,1763.81
  Bottom Layer w10: 2659.03,496.97 ccw(c2700,537.94) v1@2700,480 ; 2668.69,487.31 cw(c2641.37,460) v1@2680,460 ; 2676.1,479.9 ccw(c2700,503.8) v1@2700,470 ; v1(2700,460) 2700,459.89 2699.88,459.77 2696.23,459.77 2648,508 2648,620 2668,640 A.1@2800,640 ; A.1@2782.66,622.66 ccw(c2740.79,580.79) 2740.79,640 ccw(c2740.79,699.21) A.1@2782.66,657.34 ; A.1@2789.73,629.73 ccw(c2764.93,604.93) 2764.93,640 ccw(c2764.93,675.07) A.1@2789.73,650.27
NetA_2: A.2 R8.1 U6.31 | length 2230.7
  Top Layer w10: U6.31@2616.54,574.49 2695,574.49 2703,566.49 ; U6.31@2647.23,570.37 cw(c2657.18,560.42) 2657.18,574.49 cw(c2657.18,588.55) U6.31@2647.23,578.61 ; v1@2691.17,543.12 ccw(c2674.02,566.49) 2703,566.49 ; v1(2703,527) 2703,566.49 ; v1@2714.83,543.12 cw(c2731.98,566.49) 2703,566.49 ; A.2@2882.66,657.34 ccw(c2840.79,699.21) 2900,699.21 ccw(c2959.21,699.21) A.2@2917.34,657.34 ; A.2@2889.73,650.27 ccw(c2864.93,675.07) 2900,675.07 ccw(c2935.07,675.07) A.2@2910.27,650.27 ; A.2@2900,640 2900,750 2910,760 2910,1485 3117,1692 3347.12,1692 3347.12,1632.8 3320.32,1606 ; R8.1@3310.6,1584.48 ccw(c3291.62,1606) 3320.32,1606 ; R8.1@3320.32,1566.57 3320.32,1606 ; R8.1@3330.03,1584.48 cw(c3349.01,1606) 3320.32,1606
  Bottom Layer w10: v1(2703,527) 2782.96,527 2895.96,640 A.2@2900,640 ; v1@2717.14,512.86 cw(c2751.28,478.72) 2751.28,527 cw(c2751.28,575.28) v1@2717.14,541.14
NetA_3: A.3 U6.24 | length 1200.6
  Top Layer w10: U6.24@2616.54,354.02 2643.98,354.02 2681.07,316.93 v1(2701.77,316.93) cw(c2692.79,339.29) 2675.75,322.25 ; U6.24@2643.11,348.19 cw(c2643.11,332.01) 2654.55,343.45 ; U6.24@2648.94,354.02 ccw(c2660.9,354.02) 2652.44,345.56 ; 2654.34,343.66 ccw(c2680.52,369.85) v1@2694.32,335.49 ; 2665.04,332.96 ccw(c2686.65,354.57) v1@2698.04,326.21 ; v1@2825.86,324.14 ccw(c2791.72,358.28) 2840,358.28 ccw(c2888.28,358.28) v1@2854.14,324.14 ; v1(2840,310) 2840,480 A.3@3000,640 ; A.3@2975.47,640 cw(c2916.26,640) 2958.13,598.13 cw(c3000,556.26) A.3@3000,615.47 ; A.3@2985.47,640 cw(c2950.4,640) 2975.2,615.2 cw(c3000,590.4) A.3@3000,625.47
  Bottom Layer w10: v1(2701.77,316.93) 2701.77,314.68 2702.45,314 2836,314 v1(2840,310) ; v1@2708.84,324 ccw(c2732.99,348.14) 2732.99,314 ; v1@2715.91,302.79 cw(c2742.98,275.72) 2742.98,314 ; v1@2715.91,331.07 ccw(c2757.13,372.28) 2757.13,314 ; 2782.06,314 cw(c2782.06,252.06) v1@2825.86,295.86 ; 2801.37,314 ccw(c2801.37,348.63) v1@2825.86,324.14 ; 2806.2,314 cw(c2806.2,276.2) v1@2832.93,302.93
NetA_4: A.4 U6.23 | length 1721.9
  Top Layer w10: U6.23@2616.54,322.52 2634,322.52 2634,226 v1(2662,198) ; 2634,286.46 cw(c2679.17,286.46) U6.23@2647.23,318.4 ; 2634,310.6 cw(c2655.03,310.6) U6.23@2640.16,325.47
  Bottom Layer w10: v1(2662,198) 3080,198 3395,513 3395,560 3342,613 3342,660 3290,712 3290,746 3280,756 3179,756 3100,677 ; v1@2676.14,183.86 cw(c2710.28,149.72) 2710.28,198 cw(c2710.28,246.28) v1@2676.14,212.14 ; A.4@3090.45,662.59 ccw(c3084.36,677) 3100,677 ; A.4@3100,640 3100,677 ; A.4@3109.55,662.59 cw(c3115.64,677) 3100,677
NetA_5: A.5 U3.6 U6.22 | length 2398.2
  Top Layer w10: U6.22@2554.53,287.09 ccw(c2571.64,304.2) 2571.64,280 ; U6.22@2557.48,263.46 U6.22@2557.48,280 ; U6.22@2561.6,294.16 ccw(c2595.78,328.34) v1@2595.78,280 ; v1@2580.42,267.81 ccw(c2557.48,252.32) U6.22@2557.48,280 ; v1@2581.38,291.49 cw(c2557.48,310.6) U6.22@2557.48,280 ; v1(2597,279) 2596,280 U6.22@2557.48,280 ; v1@2911.61,267.1 cw(c2878.56,232.82) 2926.18,232.82 ; v1@2918,269.55 2918,274 v1(2925.5,281.5) ; v1@2918.56,274.3 cw(c2901.25,256.35) 2926.18,256.35 ; 2926.18,234.87 cw(c2972.13,234.87) v1@2939.64,267.35 ; v1@2926.18,281.5 2926.18,232.82 ; 3020.87,206.75 cw(c3044.49,183.14) U3.6@3044.49,216.54 ; 3028.94,214.82 cw(c3038.63,205.13) U3.6@3043.65,217.88 ; U3.6@3044.49,220 3034.12,220 3003.19,189.07 2969.93,189.07 2926.18,232.82
  Bottom Layer w10: 2532.79,296 cw(c2532.79,216.14) v1@2589.85,272 ; 2556.57,296 cw(c2556.57,239.42) v1(2597,279) ; v1@2582.71,265.01 ccw(c2509,192.86) 2509,296 ; v1@2604.07,286.07 ccw(c2635.63,317.63) 2635.63,273 ; v1@2611.14,264.86 cw(c2630.8,245.2) 2630.8,273 ; v1@2611.14,293.14 ccw(c2659.77,341.77) 2659.77,273 ; 2856.7,273 ccw(c2856.7,350.29) v1@2911.35,295.64 ; 2880.84,273 ccw(c2880.84,326.15) v1@2918.43,288.57 ; 2897.72,273 cw(c2897.72,253.72) v1@2911.35,267.35 ; v1(2925.5,281.5) 2917,273 2603,273 v1(2597,279) ; A.5@3175.47,640 cw(c3116.26,640) 3158.13,598.13 cw(c3200,556.26) A.5@3200,615.47 ; A.5@3185.47,640 cw(c3150.4,640) 3175.2,615.2 cw(c3200,590.4) A.5@3200,625.47 ; A.5@3200,640 2943,383 2529.67,383 2495,348.33 2495,310 2509,296 ; 2509,296 2580,296 v1(2597,279)
NetA_6: A.6 U5.2 U6.21 | length 1897.4
  Top Layer w10: v1@2517.86,318.86 cw(c2498.24,299.24) U6.21@2525.98,299.24 ; U6.21@2521.86,294.16 ccw(c2511.92,304.11) 2525.98,304.11 ccw(c2540.05,304.11) U6.21@2530.1,294.16 ; U6.21@2525.98,263.46 2525.98,326.98 v1(2532,333) ; U6.21@2525.98,270.19 cw(c2594.81,270.19) v1@2546.14,318.86 ; U6.21@2525.98,294.33 cw(c2570.67,294.33) v1@2539.07,325.93 ; A.6@3282.66,622.66 cw(c3240.79,580.79) 3300,580.79 cw(c3359.21,580.79) A.6@3317.34,622.66 ; A.6@3289.73,629.73 cw(c3264.93,604.93) 3300,604.93 cw(c3335.07,604.93) A.6@3310.27,629.73 ; U5.2@3292.59,249.07 ccw(c3280.96,260.69) 3297.4,260.69 ccw(c3313.85,260.69) U5.2@3302.22,249.07 ; U5.2@3297.4,224.57 3297.4,430 3300,432.6 A.6@3300,640
  Bottom Layer w10: v1(2532,333) 2561.12,362.12 ; v1@2534.37,352.86 ccw(c2538.21,385.02) 2561.12,362.12 ; v1@2551.86,335.37 cw(c2584.02,339.21) 2561.12,362.12 ; A.6@3275.47,640 cw(c3216.26,640) 3258.13,598.13 cw(c3300,556.26) A.6@3300,615.47 ; A.6@3285.47,640 cw(c3250.4,640) 3275.2,615.2 cw(c3300,590.4) A.6@3300,625.47 ; A.6@3300,640 3022.12,362.12 2561.12,362.12
NetA_7: A.7 U4.15 U6.20 | length 2252.4
  Top Layer w10: U6.20@2490.37,294.16 ccw(c2480.42,304.11) 2494.49,304.11 ccw(c2508.55,304.11) U6.20@2498.61,294.16 ; U6.20@2494.49,263.46 2494.49,389.49 ; v1@2506.03,419.83 cw(c2466.46,417.52) 2494.49,389.49 ; v1@2524.83,401.03 ccw(c2522.52,361.46) 2494.49,389.49 ; v1(2526,421) 2494.49,389.49
  Bottom Layer w10: v1@2506,421.06 ccw(c2458.21,421.2) 2492,455 ; U4.15@2516.39,1079.3 cw(c2491.32,1054.23) 2526.77,1054.23 cw(c2562.22,1054.23) U4.15@2537.16,1079.3 ; v1@2525.94,441 cw(c2525.8,488.79) 2492,455 ; v1(2526,421) 2492,455 ; U4.15@2526.77,1100 2526.77,884.23 ; A.7@3375.47,640 ccw(c3316.26,640) 3358.13,681.87 ccw(c3400,723.74) A.7@3400,664.53 ; A.7@3385.47,640 ccw(c3350.4,640) 3375.2,664.8 ccw(c3400,689.6) A.7@3400,654.53 ; A.7@3400,640 3307,733 3307,760 3294,773 2638,773 2546,865 ; 2492,455 2492,520 2546,574 2546,865 ; 2526.77,884.23 2546,865 ; 2526.77,884.23 2546,865
NetB_1: B.1 U4.13 U6.8 | length 2022.8
  Top Layer w10: B.1@2135.47,80 ccw(c2076.26,80) 2118.13,121.87 ccw(c2160,163.74) B.1@2160,104.53 ; B.1@2145.47,80 ccw(c2110.4,80) 2135.2,104.8 ccw(c2160,129.6) B.1@2160,94.53 ; U6.8@2152.77,412.89 ccw(c2142.82,402.94) 2142.82,417.01 ccw(c2142.82,431.07) U6.8@2152.77,421.13 ; B.1@2160,80 2060,180 2060,357.01 2120,417.01 U6.8@2183.46,417.01
  Bottom Layer w10: B.1@2160,80 2312,232 2312,400.33 2480,568.33 2480,625 2408.66,696.34 U4.13@2408.66,1100 ; B.1@2160,94.53 ccw(c2160,129.6) 2184.8,104.8 ccw(c2209.6,80) B.1@2174.53,80 ; B.1@2160,104.53 ccw(c2160,163.74) 2201.87,121.87 ccw(c2243.74,80) B.1@2184.53,80 ; U4.13@2398.28,1079.3 cw(c2373.21,1054.23) 2408.66,1054.23 cw(c2444.11,1054.23) U4.13@2419.05,1079.3
NetB_2: B.2 U4.14 U6.9 | length 1958.8
  Top Layer w10: U6.9@2152.77,381.39 ccw(c2142.82,371.45) 2142.82,385.51 ccw(c2142.82,399.58) U6.9@2152.77,389.63 ; U6.9@2183.46,385.51 2140,385.51 2100.06,345.57 2100.06,239.94 B.2@2260,80 ; B.2@2235.47,80 ccw(c2176.26,80) 2218.13,121.87 ccw(c2260,163.74) B.2@2260,104.53 ; B.2@2245.47,80 ccw(c2210.4,80) 2235.2,104.8 ccw(c2260,129.6) B.2@2260,94.53
  Bottom Layer w10: B.2@2260,80 2420,240 2420,390 2475,445 2475,534 2529,602.89 2467.72,664.17 U4.14@2467.72,1100 ; B.2@2260,94.53 ccw(c2260,129.6) 2284.8,104.8 ccw(c2309.6,80) B.2@2274.53,80 ; B.2@2260,104.53 ccw(c2260,163.74) 2301.87,121.87 ccw(c2343.74,80) B.2@2284.53,80 ; U4.14@2457.33,1079.3 cw(c2432.26,1054.23) 2467.72,1054.23 cw(c2503.17,1054.23) U4.14@2478.1,1079.3
NetB_3: B.3 U4.16 U6.10 | length 2520.5
  Top Layer w10: U6.10@2152.77,349.9 ccw(c2142.82,339.95) 2142.82,354.02 ccw(c2142.82,368.08) U6.10@2152.77,358.14 ; U6.10@2183.46,354.02 2140,354.02 2117.06,331.08 2117.06,258.94 2130,246 2194,246 B.3@2360,80 ; v1(2288,904) 2431.83,904 2585.83,1058 ; v1@2302.14,889.86 cw(c2336.28,855.72) 2336.28,904 cw(c2336.28,952.28) v1@2302.14,918.14 ; B.3@2335.47,80 ccw(c2276.26,80) 2318.13,121.87 ccw(c2360,163.74) B.3@2360,104.53 ; B.3@2345.47,80 ccw(c2310.4,80) 2335.2,104.8 ccw(c2360,129.6) B.3@2360,94.53 ; U4.16@2576.33,1078.48 cw(c2558.99,1058) 2585.83,1058 ; U4.16@2585.83,1100 2585.83,1058 ; U4.16@2595.32,1078.48 ccw(c2612.66,1058) 2585.83,1058
  Bottom Layer w10: v1(2288,904) 2312,880 2312,469 2295,452 2295,301 2118,124 2118,45.97 2125.97,38 2318,38 B.3@2360,80 ; B.3@2335.47,80 cw(c2276.26,80) 2318.13,38.13 cw(c2360,-3.74) B.3@2360,55.47 ; B.3@2345.47,80 cw(c2310.4,80) 2335.2,55.2 cw(c2360,30.4) B.3@2360,65.47
NetB_4: B.4 U6.11 | length 899.7
  Top Layer w10: v1@2143.16,299.12 ccw(c2125.96,322.52) U6.11@2155,322.52 ; v1(2155,283) U6.11@2155,322.52 ; v1@2155,303.89 cw(c2175.52,303.89) U6.11@2161.01,318.4 ; v1@2166.84,299.12 cw(c2184.04,322.52) U6.11@2155,322.52 ; U6.11@2183.46,322.52 U6.11@2155,322.52
  Bottom Layer w10: v1@2135,283 cw(c2086.72,283) 2120.86,248.86 cw(c2155,214.72) v1@2155,263 ; v1(2155,283) 2101,229 2101,21 2431,21 2460,50 B.4@2460,80
NetB_5: B.5 U4.17 U6.14 | length 3270.4
  Top Layer w10: U6.14@2301.39,232.77 cw(c2291.45,222.82) 2305.51,222.82 cw(c2319.58,222.82) U6.14@2309.63,232.77 ; U6.14@2305.51,263.46 2305.51,202 2402,105.51 2402,60 2440.53,21.47 2501.47,21.47 B.5@2560,80 ; B.5@2535.47,80 cw(c2476.26,80) 2518.13,38.13 cw(c2560,-3.74) B.5@2560,55.47 ; B.5@2545.47,80 cw(c2510.4,80) 2535.2,55.2 cw(c2560,30.4) B.5@2560,65.47
  Bottom Layer w10: B.5@2560,55.47 cw(c2560,-3.74) 2601.87,38.13 cw(c2643.74,80) B.5@2584.53,80 ; B.5@2560,65.47 cw(c2560,30.4) 2584.8,55.2 cw(c2609.6,80) B.5@2574.53,80 ; B.5@2560,80 2602,38 3026.19,38 3442,453.81 3442,690 3342,790 2674.31,790 2626,838.31 2626,983.12 2644.88,1002 U4.17@2644.88,1100 ; U4.17@2634.5,1079.3 cw(c2609.43,1054.23) 2644.88,1054.23 cw(c2680.33,1054.23) U4.17@2655.27,1079.3
NetB_6: B.6 U6.15 | length 609.6
  Top Layer w10: U6.15@2332.89,232.77 cw(c2322.94,222.82) 2337.01,222.82 cw(c2351.07,222.82) U6.15@2341.13,232.77 ; U6.15@2337.01,263.46 2337.01,194.55 2409.55,122 2618,122 B.6@2660,80 ; B.6@2635.47,80 ccw(c2576.26,80) 2618.13,121.87 ccw(c2660,163.74) B.6@2660,104.53 ; B.6@2645.47,80 ccw(c2610.4,80) 2635.2,104.8 ccw(c2660,129.6) B.6@2660,94.53
NetC1_2: C1.2 D1.1 U1.1 | length 787
  Top Layer w10: C1.2@533.46,280 D1.1@795.63,280 795.63,330 749.45,376.18 U1.1@749.45,583.86 ; C1.2@545.82,269.62 cw(c570.89,244.55) 570.89,280 cw(c570.89,315.45) C1.2@545.82,290.38 ; U1.1@740.46,555.18 cw(c718.75,533.47) 749.45,533.47 cw(c780.15,533.47) U1.1@758.44,555.18 ; D1.1@786.5,270.87 ccw(c764.45,248.82) 764.45,280 ccw(c764.45,311.18) D1.1@786.5,289.13 ; D1.1@786.5,295.23 ccw(c764.45,317.28) 795.63,317.28 ccw(c826.81,317.28) D1.1@804.76,295.23
NetC4_2: C4.2 U4.1 | length 2585.2
  Top Layer w10: v1@1647.86,1252.86 cw(c1635.44,1240.44) 1653,1240.44 ; 1653,1203.36 cw(c1717.32,1203.36) v1@1675.12,1251.91 ; 1653,1225.31 cw(c1698.24,1225.31) v1@1668.56,1259.45 ; v1(1662,1267) 1653,1258 1653,1204 1700,1157 U4.1@1700,1100 ; U4.1@1689.62,1120.7 ccw(c1664.55,1145.77) 1700,1145.77 ccw(c1735.45,1145.77) U4.1@1710.38,1120.7 ; v1@3095.86,1328.14 ccw(c3061.72,1362.28) 3110,1362.28 ccw(c3158.28,1362.28) v1@3124.14,1328.14 ; v1(3110,1314) 3110,1620 3150,1660 C4.2@3246.54,1660 ; C4.2@3234.18,1649.62 ccw(c3209.11,1624.55) 3209.11,1660 ccw(c3209.11,1695.45) C4.2@3234.18,1670.38
  Bottom Layer w10: v1(1662,1267) 1664,1265 3078.67,1265 3110,1296.33 v1(3110,1314) ; v1@1669.07,1274.07 ccw(c1690.97,1295.97) 1690.97,1265 ; v1@1676.14,1252.86 cw(c1705.46,1223.54) 1705.46,1265 ; v1@1676.14,1281.14 ccw(c1715.11,1320.11) 1715.11,1265 ; 3087.51,1273.84 ccw(c3068.81,1292.54) v1@3092.26,1304.76 ; 3097.15,1283.48 ccw(c3081.49,1299.14) v1@3101.13,1309.38
NetC5_2: C5.2 U4.2 | length 1142
  Top Layer w10: C5.2@1593.46,360 1640,360 1694,414 1694,732 v1(1703,741) ; C5.2@1605.82,349.62 cw(c1630.89,324.55) 1630.89,360 cw(c1630.89,395.45) C5.2@1605.82,370.38 ; v1@1688.86,726.86 cw(c1676.44,714.44) 1694,714.44 ; 1694,670.99 cw(c1773.01,670.99) v1@1717.14,726.86 ; 1694,695.13 cw(c1748.87,695.13) v1@1710.07,733.93
  Bottom Layer w10: v1@1688.86,755.14 ccw(c1654.72,789.28) 1703,789.28 ccw(c1751.28,789.28) v1@1717.14,755.14 ; v1(1703,741) 1703,995.94 1759.06,1052 U4.2@1759.06,1100 ; U4.2@1748.67,1079.3 cw(c1723.6,1054.23) 1759.06,1054.23 cw(c1794.51,1054.23) U4.2@1769.44,1079.3
NetC6_2: C6.2 U4.3 | length 1008
  Top Layer w10: C6.2@1593.46,440 1612,440 1612,472 ; C6.2@1595.09,454.68 ccw(c1594.68,472) 1612,472 ; C6.2@1595.32,444.68 ccw(c1594.92,461.76) 1612,461.76 ; C6.2@1595.56,434.69 ccw(c1595.16,451.52) C6.2@1612,451.52 ; 1782.96,1034.85 ccw(c1733.17,1084.63) U4.3@1803.45,1088.81 ; 1798.69,1050.58 ccw(c1762.87,1086.4) U4.3@1813.43,1089.41 ; 1814.42,1066.31 ccw(c1792.56,1088.16) U4.3@1823.42,1090 ; U4.3@1818.11,1100 1818.11,1070 1773.11,1025 1711,1025 1666,980 1666,526 1612,472
NetC7_2: C7.2 U4.4 | length 1427.1
  Top Layer w10: C7.2@1589.07,534.01 ccw(c1587.19,540) 1593.46,540 ; C7.2@1590.12,520 cw(c1630.32,520) 1601.89,548.43 ; C7.2@1593.46,520 1593.46,540 ; C7.2@1597.86,534.01 cw(c1599.74,540) 1593.46,540 ; C7.2@1600.12,520 cw(c1664.46,520) 1618.96,565.5 ; C7.2@1610.12,520 cw(c1698.61,520) 1636.04,582.57 ; U4.4@1869.37,1122.76 ccw(c1860.57,1136.83) 1877.17,1136.83 ; U4.4@1877.17,1100 1877.17,1136.83 ; U4.4@1884.96,1122.76 cw(c1893.77,1136.83) 1877.17,1136.83 ; 1593.46,540 1644.12,590.65 1644.12,806.88 1567,884 1567,1252 1623,1308 1706,1308 1877.17,1136.83
NetC8_2: C8.2 U4.5 | length 3102.1
  Top Layer w10: U4.5@1927.31,1078.01 cw(c1913.56,1060) 1936.22,1060 ; U4.5@1936.22,1100 1936.22,1060 ; U4.5@1945.13,1078.01 ccw(c1958.88,1060) 1936.22,1060 ; C8.2@3234.18,1919.62 ccw(c3209.11,1894.55) 3209.11,1930 ccw(c3209.11,1965.45) C8.2@3234.18,1940.38 ; C8.2@3246.54,1930 3132,1930 3082,1980 3082,2222 3065,2239 2680,2239 2631,2190 2631,1233 2677,1187 2677,1058 2625,1058 2424,857 2256,857 2105,1008 1988.22,1008 1936.22,1060